# Altium PCB slave.PcbDoc (part 4 of 8)
Units mm, origin at the board's own origin, x right, y up, seen from the top; angles counter-clockwise.
Board outline 160 x 100 mm, 6 copper layers (Top, FUSED_VBAT-, Signals1, Signals2, SUPPLY, Bottom), stack 1.67 mm thick; 582 components, 375 nets, 1615 pads, 3043 vias.
Unrouted connection lines stored in the file: 1.
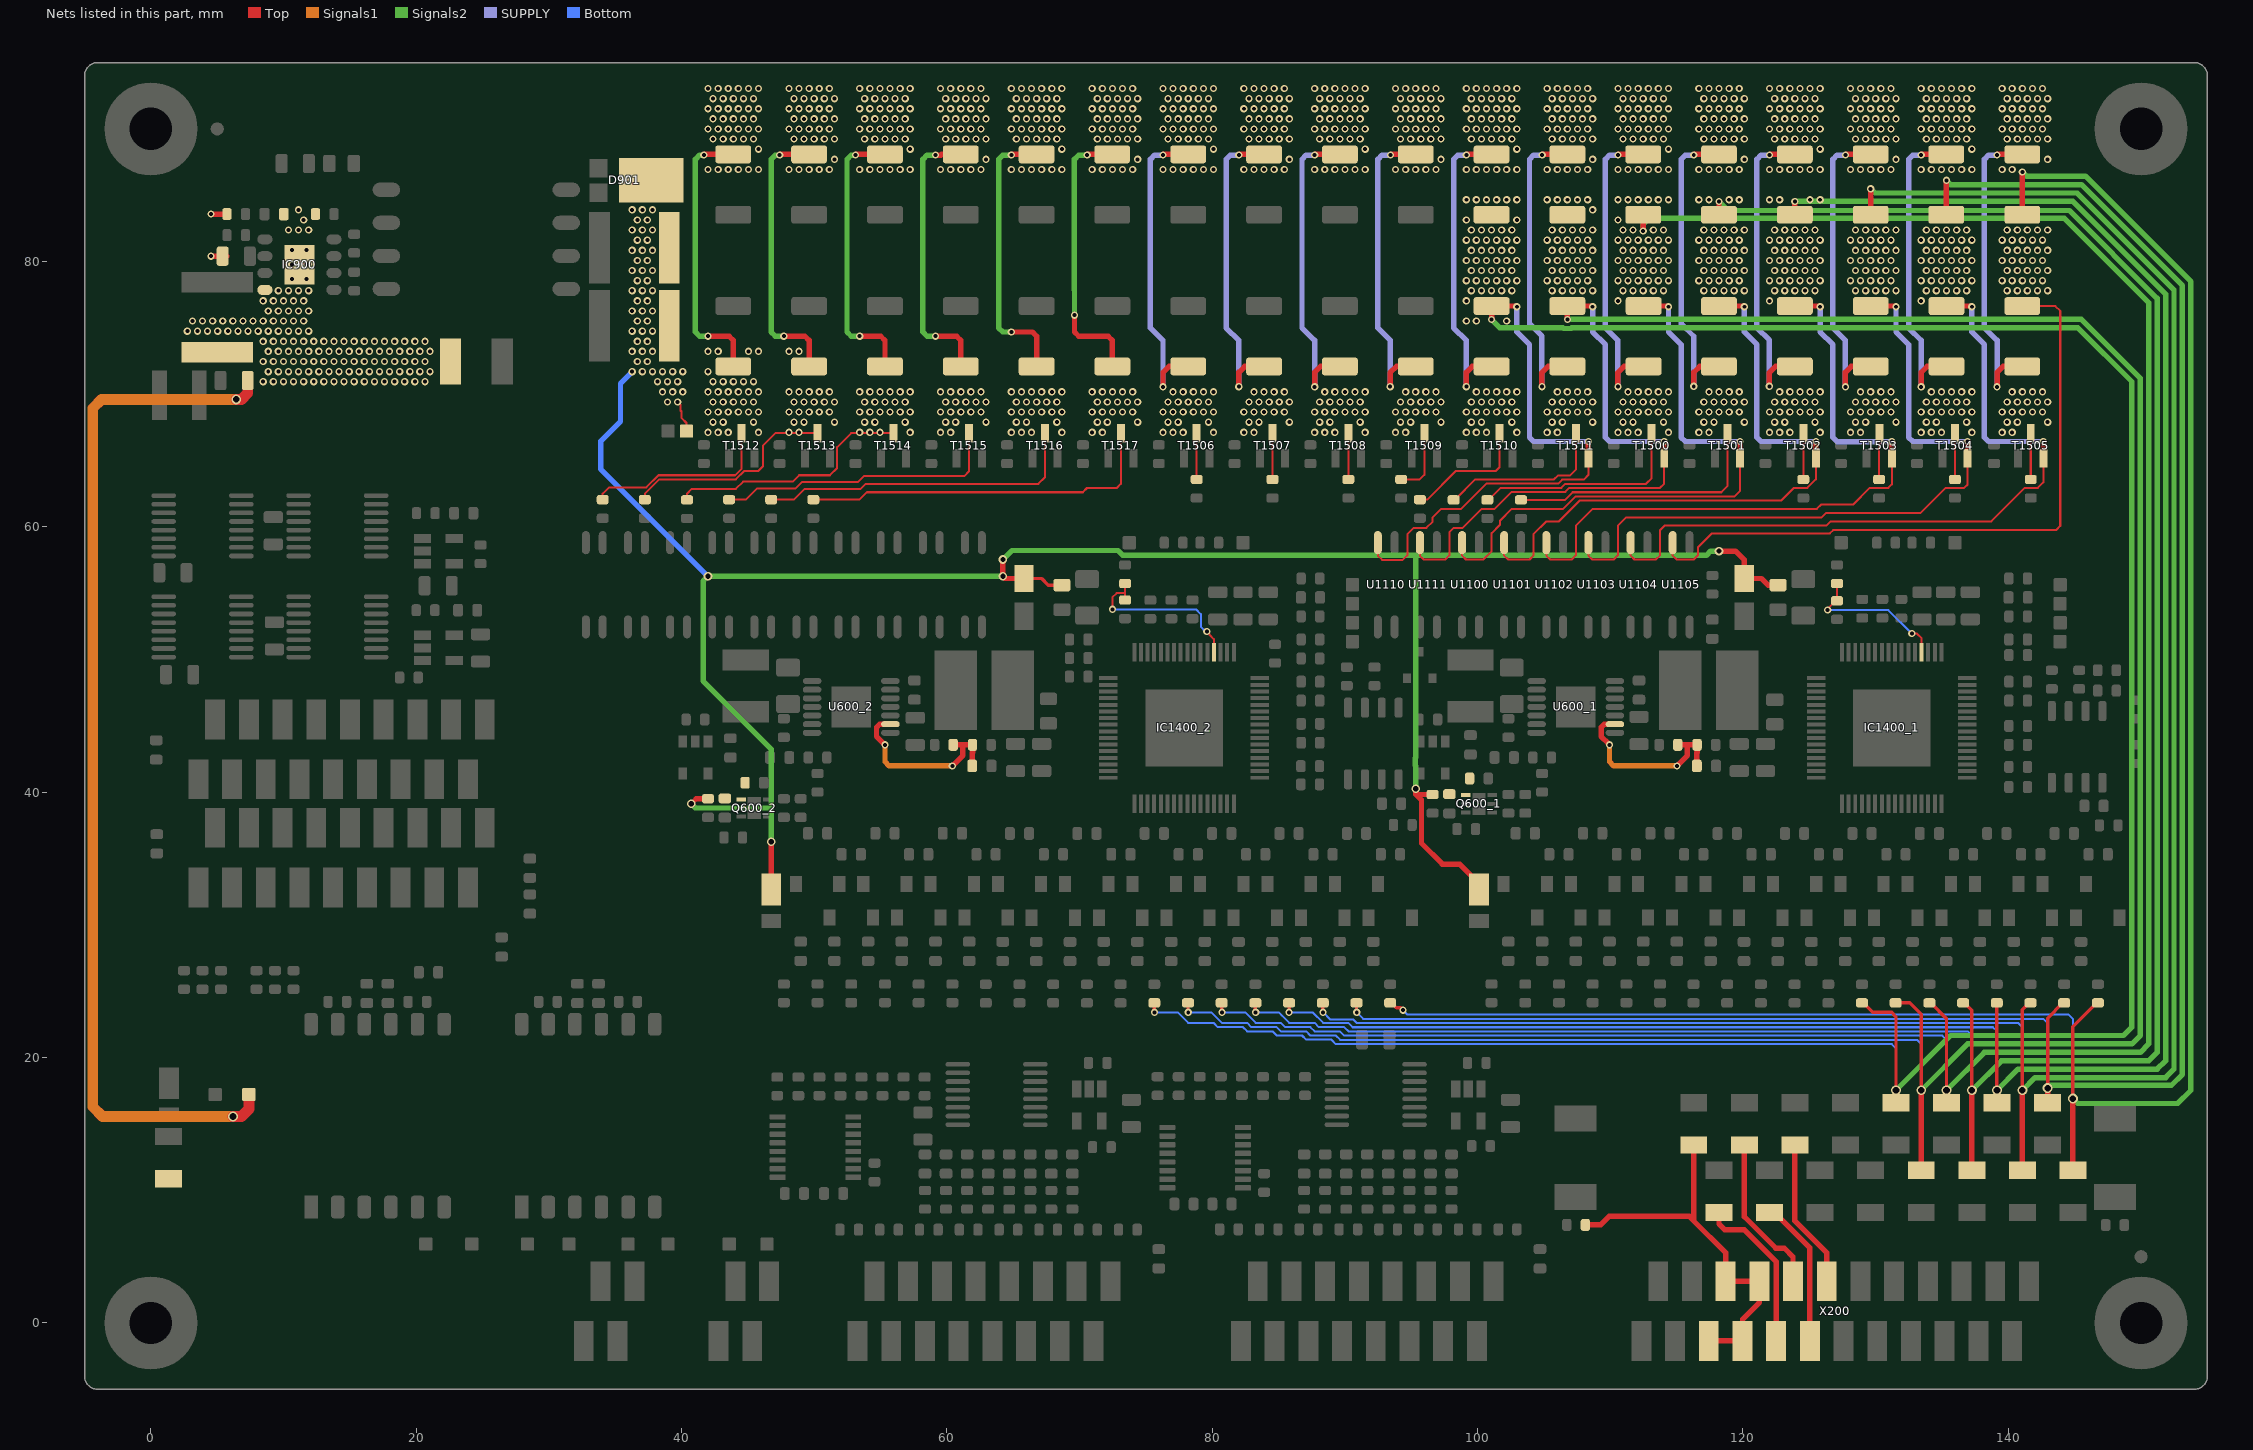
[diagram p7: the nets of this part, all layers, seen from the top]

## Via types
v1: diameter 0.55, hole 0.3, Top to Bottom, tented both sides, 2963 vias
v2: diameter 0.55, hole 0.3, Top to Bottom, 41 vias
v3: diameter 0.75, hole 0.5, Top to Bottom, tented both sides, 22 vias
v4: diameter 0.65, hole 0.4, Top to Bottom, tented both sides, 16 vias
v5: diameter 0.75, hole 0.5, Top to Bottom, 1 vias

## Nets (pads, with @x,y where several pads share a name; then routed paths per layer and width w, separated by ;. In a path a pad name is that pad's centre, name@x,y a point inside that pad or via, vN(x,y) a via of type N, cw(c..) or ccw(c..) an arc to the next point about the centre after c; other vN are vias at no path point) (continued)
CELL_10+: F308.1 X200.12 | length 11.5
  Top w0.406: F308.1@123.911,13.645 F308.1@123.911,13.405 123.911,7.692 126.313,5.29 X200.12@126.313,3.143
CELL_11+: F307.1 X200.11 | length 11.2
  Top w0.406: F307.1@122.006,8.325 122.371,8.325 125.043,5.653 X200.11@125.043,-1.357
CELL_12+: F306.1 X200.10 | length 12.4
  Top w0.406: F306.1@120.101,13.645 F306.1@120.101,13.405 120.101,8.002 122.474,5.628 123.117,5.628 123.773,4.973 X200.10@123.773,3.143
CELL_13+: F305.1 X200.9 | length 12.3
  Top w0.406: F305.1@118.196,8.325 118.196,7.451 118.631,7.016 120.111,7.016 122.503,4.625 X200.9@122.503,-1.357
CELL_14+: F304.1 SJ300.2 X200.5 X200.6 X200.7 X200.8 | length 30.2
  Top w0.406: SJ300.2@108.121,7.387 109.273,7.387 109.915,8.029 115.954,8.029 116.289,7.694 118.693,5.29 X200.6@118.693,3.143 X200.8@121.233,3.143 121.233,1.542 119.963,0.272 X200.7@119.963,-1.357 X200.5@117.423,-1.357 ; 116.291,7.696 F304.1@116.291,13.405 F304.1@116.291,13.645
CELL_FEEDBACK.CELL0_FEEDBACK+: R1105.1 R1505.2 R1511.2 T1505.3 | length 27.2
  Top w0.152: R1105.1@141.691,63.572 T1505.3@141.691,67.062
  Top w0.406: v1(139.151,70.557) 139.151,71.639 139.604,72.092 R1505.2@141.056,72.092 ; v1(139.151,88.02) 139.203,88.072 R1511.2@141.056,88.072
  SUPPLY w0.406: v1(139.151,70.557) 139.151,74.05 138.198,75.002 138.198,87.702 138.516,88.02 v1(139.151,88.02)
  other v1: 139.532,67.128 140.294,67.128 139.913,67.89 140.675,67.89 142.961,67.89 139.532,68.652 140.294,68.652 141.056,68.652 141.818,68.652 142.58,68.652 139.913,69.414 140.675,69.414 141.437,69.414 142.199,69.414 142.961,69.414 140.294,70.176 141.056,70.176 141.818,70.176 142.58,70.176 139.532,86.94 140.294,86.94 142.961,87.702 139.913,89.226 140.675,89.226 141.437,89.226 142.199,89.226 142.961,89.226 139.532,89.988 140.294,89.988 141.056,89.988 141.818,89.988 142.58,89.988 139.913,90.75 140.675,90.75 141.437,90.75 142.199,90.75 142.961,90.75 139.532,91.512 140.294,91.512 141.056,91.512 141.818,91.512 142.58,91.512 139.913,92.274 140.675,92.274 141.437,92.274 142.199,92.274 142.961,92.274 139.532,93.036 140.294,93.036 141.056,93.036 141.818,93.036 142.58,93.036
CELL_FEEDBACK.CELL1_FEEDBACK+: R1104.1 R1504.2 R1510.2 T1504.3 | length 27.2
  Top w0.152: R1104.1@135.976,63.572 T1504.3@135.976,67.062
  Top w0.406: v1(133.436,70.557) 133.436,71.639 133.889,72.092 R1504.2@135.341,72.092 ; v1(133.436,88.02) 133.488,88.072 R1510.2@135.321,88.072
  SUPPLY w0.406: v1(133.436,70.557) 133.436,74.05 132.483,75.002 132.483,87.702 132.801,88.02 v1(133.436,88.02)
  other v1: 133.436,67.128 134.198,67.128 134.96,67.128 137.246,67.128 133.817,67.89 134.579,67.89 136.865,67.89 133.436,68.652 134.198,68.652 134.96,68.652 135.722,68.652 136.484,68.652 137.246,68.652 133.817,69.414 134.579,69.414 135.341,69.414 136.103,69.414 136.865,69.414 134.198,70.176 134.96,70.176 135.722,70.176 136.484,70.176 137.246,70.176 133.436,86.94 134.198,86.94 134.96,86.94 135.722,86.94 136.484,86.94 137.246,86.94 137.246,88.464 133.817,89.226 134.579,89.226 135.341,89.226 136.103,89.226 136.865,89.226 133.436,89.988 134.198,89.988 134.96,89.988 135.722,89.988 136.484,89.988 137.246,89.988 133.817,90.75 134.579,90.75 135.341,90.75 136.103,90.75 136.865,90.75 133.436,91.512 134.198,91.512 134.96,91.512 135.722,91.512 136.484,91.512 137.246,91.512 133.817,92.274 134.579,92.274 135.341,92.274 136.103,92.274 136.865,92.274 133.436,93.036 134.198,93.036 134.96,93.036 135.722,93.036 136.484,93.036 137.246,93.036
CELL_FEEDBACK.CELL2_FEEDBACK+: R1103.1 R1503.2 R1509.2 T1503.3 | length 27.2
  Top w0.152: R1103.1@130.261,63.572 130.261,66.248 130.273,66.261 T1503.3@130.273,67.062
  Top w0.406: v1(127.721,70.557) 127.721,71.639 128.174,72.092 R1503.2@129.626,72.092 ; v1(127.721,88.02) 127.773,88.072 R1509.2@129.626,88.072
  SUPPLY w0.406: v1(127.721,70.557) 127.721,74.05 126.768,75.002 126.768,87.702 127.086,88.02 v1(127.721,88.02)
  other v1: 128.102,67.128 128.864,67.128 128.483,67.89 129.245,67.89 131.531,67.89 128.102,68.652 128.864,68.652 129.626,68.652 130.388,68.652 131.15,68.652 128.483,69.414 129.245,69.414 130.007,69.414 130.769,69.414 131.531,69.414 128.864,70.176 129.626,70.176 130.388,70.176 131.15,70.176 128.102,86.94 128.864,86.94 129.626,86.94 130.388,86.94 131.15,86.94 131.531,87.702 128.483,89.226 129.245,89.226 130.007,89.226 130.769,89.226 131.531,89.226 128.102,89.988 128.864,89.988 129.626,89.988 130.388,89.988 131.15,89.988 128.483,90.75 129.245,90.75 130.007,90.75 130.769,90.75 131.531,90.75 128.102,91.512 128.864,91.512 129.626,91.512 130.388,91.512 131.15,91.512 128.483,92.274 129.245,92.274 130.007,92.274 130.769,92.274 131.531,92.274 128.102,93.036 128.864,93.036 129.626,93.036 130.388,93.036 131.15,93.036
CELL_FEEDBACK.CELL3_FEEDBACK+: R1102.1 R1502.2 R1508.2 T1502.3 | length 27.2
  Top w0.152: R1102.1@124.546,63.572 T1502.3@124.546,67.062
  Top w0.406: v1(121.987,70.587) 121.987,71.62 122.459,72.092 R1502.2@123.911,72.092 ; v1(122.006,88.02) 122.058,88.072 R1508.2@123.911,88.072
  SUPPLY w0.406: v1@122.006,70.606 v1(121.987,70.587) 121.987,74.068 121.053,75.002 121.053,87.702 121.371,88.02 v1(122.006,88.02)
  other v1: 122.006,67.128 122.768,67.128 123.53,67.128 125.816,67.128 122.387,67.89 123.149,67.89 125.435,67.89 122.006,68.652 122.768,68.652 123.53,68.652 124.292,68.652 125.054,68.652 125.816,68.652 122.387,69.414 123.149,69.414 123.911,69.414 124.673,69.414 125.435,69.414 122.768,70.176 123.53,70.176 124.292,70.176 125.054,70.176 125.816,70.176 122.006,86.94 122.768,86.94 123.53,86.94 124.292,86.94 125.054,86.94 125.816,86.94 125.816,88.464 122.387,89.226 123.149,89.226 123.911,89.226 124.673,89.226 125.435,89.226 122.006,89.988 122.768,89.988 123.53,89.988 124.292,89.988 125.054,89.988 125.816,89.988 122.387,90.75 123.149,90.75 123.911,90.75 124.673,90.75 125.435,90.75 122.006,91.512 122.768,91.512 123.53,91.512 124.292,91.512 125.054,91.512 125.816,91.512 122.387,92.274 123.149,92.274 123.911,92.274 124.673,92.274 125.435,92.274 122.006,93.036 122.768,93.036 123.53,93.036 124.292,93.036 125.054,93.036 125.816,93.036
CELL_FEEDBACK.CELL4_FEEDBACK+: R1101.1 R1501.2 R1507.2 T1501.3 | length 43.6
  Top w0.152: R1101.1@103.273,62.037 106.592,62.037 107.162,62.607 118.366,62.607 118.831,63.072 T1501.3@118.831,67.062
  Top w0.406: v1(116.291,70.587) 116.291,71.639 116.744,72.092 R1501.2@118.196,72.092 ; v1(116.291,88.02) 116.343,88.072 R1507.2@118.196,88.072
  SUPPLY w0.406: v1(116.291,70.587) 116.291,74.367 115.338,75.32 115.338,87.702 115.656,88.02 v1(116.291,88.02)
  other v1: 116.672,67.128 117.434,67.128 117.053,67.89 117.815,67.89 120.101,67.89 116.672,68.652 117.434,68.652 118.196,68.652 118.958,68.652 119.72,68.652 117.053,69.414 117.815,69.414 118.577,69.414 119.339,69.414 120.101,69.414 117.434,70.176 118.196,70.176 118.958,70.176 119.72,70.176 116.672,86.94 117.434,86.94 118.196,86.94 118.958,86.94 119.72,86.94 120.101,87.702 117.053,89.226 117.815,89.226 118.577,89.226 119.339,89.226 120.101,89.226 116.672,89.988 117.434,89.988 118.196,89.988 118.958,89.988 119.72,89.988 117.053,90.75 117.815,90.75 118.577,90.75 119.339,90.75 120.101,90.75 116.672,91.512 117.434,91.512 118.196,91.512 118.958,91.512 119.72,91.512 117.053,92.274 117.815,92.274 118.577,92.274 119.339,92.274 120.101,92.274 116.672,93.036 117.434,93.036 118.196,93.036 118.958,93.036 119.72,93.036
CELL_FEEDBACK.CELL5_FEEDBACK+: R1100.1 R1500.2 R1506.2 T1500.3 | length 40.2
  Top w0.152: R1100.1@100.733,62.037 100.833,62.037 101.733,62.937 106.313,62.937 106.618,63.242 112.693,63.242 113.116,63.665 T1500.3@113.116,67.062
  Top w0.406: v1(110.576,70.567) 110.576,71.619 111.049,72.092 R1500.2@112.511,72.092 ; v1(110.576,88.02) 110.628,88.072 R1506.2@112.481,88.072
  SUPPLY w0.406: v1(110.576,70.567) 110.576,74.05 109.623,75.002 109.623,87.702 109.941,88.02 v1(110.576,88.02)
  other v1: 110.576,67.128 111.338,67.128 112.1,67.128 114.386,67.128 110.957,67.89 111.719,67.89 114.005,67.89 110.576,68.652 111.338,68.652 112.1,68.652 112.862,68.652 113.624,68.652 114.386,68.652 110.957,69.414 111.719,69.414 112.481,69.414 113.243,69.414 114.005,69.414 111.338,70.176 112.1,70.176 112.862,70.176 113.624,70.176 114.386,70.176 110.576,86.94 111.338,86.94 112.1,86.94 112.862,86.94 113.624,86.94 114.386,86.94 114.386,88.464 110.957,89.226 111.719,89.226 112.481,89.226 113.243,89.226 114.005,89.226 110.576,89.988 111.338,89.988 112.1,89.988 112.862,89.988 113.624,89.988 114.386,89.988 110.957,90.75 111.719,90.75 112.481,90.75 113.243,90.75 114.005,90.75 110.576,91.512 111.338,91.512 112.1,91.512 112.862,91.512 113.624,91.512 114.386,91.512 110.957,92.274 111.719,92.274 112.481,92.274 113.243,92.274 114.005,92.274 110.576,93.036 111.338,93.036 112.1,93.036 112.862,93.036 113.624,93.036 114.386,93.036
CELL_FEEDBACK.CELL6_FEEDBACK+: R1111.1 R1523.2 R1529.2 T1511.3 | length 36.6
  Top w0.152: R1111.1@98.193,62.037 98.293,62.037 99.829,63.573 105.759,63.573 106.063,63.877 106.971,63.877 107.401,64.307 T1511.3@107.401,67.062
  Top w0.406: v1(104.848,70.567) 104.848,71.626 105.314,72.092 R1523.2@106.766,72.092 ; v1(104.861,88.02) 104.913,88.072 R1529.2@106.766,88.072
  SUPPLY w0.406: v1@104.861,70.58 v1(104.848,70.567) 104.848,74.38 103.908,75.32 103.908,87.702 104.226,88.02 v1(104.861,88.02)
  other v1: 105.242,67.128 106.004,67.128 105.623,67.89 106.385,67.89 108.671,67.89 105.242,68.652 106.004,68.652 106.766,68.652 107.528,68.652 108.29,68.652 105.623,69.414 106.385,69.414 107.147,69.414 107.909,69.414 108.671,69.414 106.004,70.176 106.766,70.176 107.528,70.176 108.29,70.176 105.242,86.94 106.004,86.94 106.766,86.94 107.528,86.94 108.29,86.94 108.671,87.702 105.623,89.226 106.385,89.226 107.147,89.226 107.909,89.226 108.671,89.226 105.242,89.988 106.004,89.988 106.766,89.988 107.528,89.988 108.29,89.988 105.623,90.75 106.385,90.75 107.147,90.75 107.909,90.75 108.671,90.75 105.242,91.512 106.004,91.512 106.766,91.512 107.528,91.512 108.29,91.512 105.623,92.274 106.385,92.274 107.147,92.274 107.909,92.274 108.671,92.274 105.242,93.036 106.004,93.036 106.766,93.036 107.528,93.036 108.29,93.036
CELL_FEEDBACK.CELL7_FEEDBACK+: R1110.1 R1522.2 R1528.2 T1510.3 | length 33.3
  Top w0.152: R1110.1@95.648,62.05 96.2,62.05 98.362,64.212 101.368,64.212 101.666,64.51 T1510.3@101.666,67.062
  Top w0.406: v1(99.146,70.567) 99.146,71.639 99.599,72.092 R1522.2@101.051,72.092 ; v1(99.146,88.02) 99.198,88.072 R1528.2@101.051,88.072
  SUPPLY w0.406: v1(99.146,70.567) 99.146,74.05 98.193,75.002 98.193,87.702 98.511,88.02 v1(99.146,88.02)
  other v1: 99.146,67.128 99.908,67.128 100.67,67.128 102.956,67.128 99.527,67.89 100.289,67.89 102.575,67.89 99.146,68.652 99.908,68.652 100.67,68.652 101.432,68.652 102.194,68.652 102.956,68.652 99.527,69.414 100.289,69.414 101.051,69.414 101.813,69.414 102.575,69.414 99.908,70.176 100.67,70.176 101.432,70.176 102.194,70.176 102.956,70.176 99.146,86.94 99.908,86.94 100.67,86.94 101.432,86.94 102.194,86.94 102.956,86.94 102.956,88.464 99.527,89.226 100.289,89.226 101.051,89.226 101.813,89.226 102.575,89.226 99.146,89.988 99.908,89.988 100.67,89.988 101.432,89.988 102.194,89.988 102.956,89.988 99.527,90.75 100.289,90.75 101.051,90.75 101.813,90.75 102.575,90.75 99.146,91.512 99.908,91.512 100.67,91.512 101.432,91.512 102.194,91.512 102.956,91.512 99.527,92.274 100.289,92.274 101.051,92.274 101.813,92.274 102.575,92.274 99.146,93.036 99.908,93.036 100.67,93.036 101.432,93.036 102.194,93.036 102.956,93.036
CELL_FEEDBACK.CELL8_FEEDBACK+: R1109.1 R1521.2 R1527.2 T1509.3 | length 28.7
  Top w0.152: R1109.1@94.241,63.572 95.636,63.572 95.986,63.921 T1509.3@95.986,67.062
  Top w0.406: v1(93.411,70.567) 93.411,71.619 93.884,72.092 R1521.2@95.336,72.092 ; v1(93.431,88.02) 93.483,88.072 R1527.2@95.336,88.072
  SUPPLY w0.406: v1(93.411,70.567) 93.411,74.07 92.478,75.002 92.478,87.702 92.796,88.02 v1(93.431,88.02)
  other v1: 93.812,67.128 94.574,67.128 94.193,67.89 94.955,67.89 97.241,67.89 93.812,68.652 94.574,68.652 95.336,68.652 96.098,68.652 96.86,68.652 94.193,69.414 94.955,69.414 95.717,69.414 96.479,69.414 97.241,69.414 94.574,70.176 95.336,70.176 96.098,70.176 96.86,70.176 93.812,86.94 94.574,86.94 95.336,86.94 96.098,86.94 96.86,86.94 97.241,87.702 94.193,89.226 94.955,89.226 95.717,89.226 96.479,89.226 97.241,89.226 93.812,89.988 94.574,89.988 95.336,89.988 96.098,89.988 96.86,89.988 94.193,90.75 94.955,90.75 95.717,90.75 96.479,90.75 97.241,90.75 93.812,91.512 94.574,91.512 95.336,91.512 96.098,91.512 96.86,91.512 94.193,92.274 94.955,92.274 95.717,92.274 96.479,92.274 97.241,92.274 93.812,93.036 94.574,93.036 95.336,93.036 96.098,93.036 96.86,93.036
CELL_FEEDBACK.CELL9_FEEDBACK+: R1108.1 R1520.2 R1526.2 T1508.3 | length 27.2
  Top w0.152: R1108.1@90.256,63.572 T1508.3@90.256,67.062
  Top w0.406: v1(87.716,70.557) 87.716,71.639 88.169,72.092 R1520.2@89.621,72.092 ; v1(87.716,88.02) 87.768,88.072 R1526.2@89.621,88.072
  SUPPLY w0.406: v1(87.716,70.557) 87.716,74.05 86.763,75.002 86.763,87.702 87.081,88.02 v1(87.716,88.02)
  other v1: 87.716,67.128 88.478,67.128 89.24,67.128 91.526,67.128 88.097,67.89 88.859,67.89 91.145,67.89 87.716,68.652 88.478,68.652 89.24,68.652 90.002,68.652 90.764,68.652 91.526,68.652 88.097,69.414 88.859,69.414 89.621,69.414 90.383,69.414 91.145,69.414 88.478,70.176 89.24,70.176 90.002,70.176 90.764,70.176 91.526,70.176 87.716,86.94 88.478,86.94 89.24,86.94 90.002,86.94 90.764,86.94 91.526,86.94 91.526,88.464 88.097,89.226 88.859,89.226 89.621,89.226 90.383,89.226 91.145,89.226 87.716,89.988 88.478,89.988 89.24,89.988 90.002,89.988 90.764,89.988 91.526,89.988 88.097,90.75 88.859,90.75 89.621,90.75 90.383,90.75 91.145,90.75 87.716,91.512 88.478,91.512 89.24,91.512 90.002,91.512 90.764,91.512 91.526,91.512 88.097,92.274 88.859,92.274 89.621,92.274 90.383,92.274 91.145,92.274 87.716,93.036 88.478,93.036 89.24,93.036 90.002,93.036 90.764,93.036 91.526,93.036
CELL_FEEDBACK.CELL10_FEEDBACK+: R1107.1 R1519.2 R1525.2 T1507.3 | length 27.2
  Top w0.152: R1107.1@84.541,63.572 T1507.3@84.541,67.062
  Top w0.406: v1(82.001,70.567) 82.001,71.639 82.454,72.092 R1519.2@83.906,72.092 ; v1(82.001,88.02) 82.053,88.072 R1525.2@83.906,88.072
  SUPPLY w0.406: v1@82.001,70.557 v1(82.001,70.567) 82.001,74.05 81.048,75.002 81.048,87.702 81.366,88.02 v1(82.001,88.02)
  other v1: 82.382,67.128 83.144,67.128 82.763,67.89 83.525,67.89 85.811,67.89 82.382,68.652 83.144,68.652 83.906,68.652 84.668,68.652 85.43,68.652 82.763,69.414 83.525,69.414 84.287,69.414 85.049,69.414 85.811,69.414 83.144,70.176 83.906,70.176 84.668,70.176 85.43,70.176 82.382,86.94 83.144,86.94 83.906,86.94 84.668,86.94 85.43,86.94 85.811,87.702 82.763,89.226 83.525,89.226 84.287,89.226 85.049,89.226 85.811,89.226 82.382,89.988 83.144,89.988 83.906,89.988 84.668,89.988 85.43,89.988 82.763,90.75 83.525,90.75 84.287,90.75 85.049,90.75 85.811,90.75 82.382,91.512 83.144,91.512 83.906,91.512 84.668,91.512 85.43,91.512 82.763,92.274 83.525,92.274 84.287,92.274 85.049,92.274 85.811,92.274 82.382,93.036 83.144,93.036 83.906,93.036 84.668,93.036 85.43,93.036
CELL_FEEDBACK.CELL11_FEEDBACK+: R1106.1 R1518.2 R1524.2 T1506.3 | length 27.2
  Top w0.152: R1106.1@78.826,63.572 T1506.3@78.826,67.062
  Top w0.406: v1(76.286,70.557) 76.286,71.639 76.739,72.092 R1518.2@78.191,72.092 ; v1(76.286,88.02) 76.338,88.072 R1524.2@78.191,88.072
  SUPPLY w0.406: v1(76.286,70.557) 76.286,74.05 75.333,75.002 75.333,87.702 75.651,88.02 v1(76.286,88.02)
  other v1: 76.286,67.128 77.048,67.128 77.81,67.128 80.096,67.128 76.667,67.89 77.429,67.89 79.715,67.89 76.286,68.652 77.048,68.652 77.81,68.652 78.572,68.652 79.334,68.652 80.096,68.652 76.667,69.414 77.429,69.414 78.191,69.414 78.953,69.414 79.715,69.414 77.048,70.176 77.81,70.176 78.572,70.176 79.334,70.176 80.096,70.176 76.286,86.94 77.048,86.94 77.81,86.94 78.572,86.94 79.334,86.94 80.096,86.94 80.096,88.464 76.667,89.226 77.429,89.226 78.191,89.226 78.953,89.226 79.715,89.226 76.286,89.988 77.048,89.988 77.81,89.988 78.572,89.988 79.334,89.988 80.096,89.988 76.667,90.75 77.429,90.75 78.191,90.75 78.953,90.75 79.715,90.75 76.286,91.512 77.048,91.512 77.81,91.512 78.572,91.512 79.334,91.512 80.096,91.512 76.667,92.274 77.429,92.274 78.191,92.274 78.953,92.274 79.715,92.274 76.286,93.036 77.048,93.036 77.81,93.036 78.572,93.036 79.334,93.036 80.096,93.036
CELL_FEEDBACK.CELL12_FEEDBACK+: R1117.1 R1541.2 R1547.2 T1517.3 | length 48.6
  Top w0.152: R1117.1@49.921,62.05 53.407,62.05 53.965,62.607 70.241,62.607 70.561,62.927 72.801,62.927 73.111,63.237 T1517.3@73.111,67.062
  Top w0.406: v1(69.618,75.955) 69.618,74.685 69.936,74.367 72.158,74.367 72.471,74.054 R1541.2@72.471,72.092 ; v1(70.571,88.02) 70.623,88.072 R1547.2@72.456,88.072
  Signals2 w0.406: 69.608,77.86 69.608,87.692 69.936,88.02 v1(70.571,88.02) ; v1(69.618,75.955) 69.618,77.86
  other v1: 70.952,67.128 71.714,67.128 71.333,67.89 72.095,67.89 74.381,67.89 70.952,68.652 71.714,68.652 72.476,68.652 73.238,68.652 74,68.652 71.333,69.414 72.095,69.414 72.857,69.414 73.619,69.414 74.381,69.414 70.952,70.176 71.714,70.176 72.476,70.176 73.238,70.176 74,70.176 70.952,86.94 71.714,86.94 72.476,86.94 73.238,86.94 74,86.94 74.381,87.702 71.333,89.226 72.095,89.226 72.857,89.226 73.619,89.226 74.381,89.226 70.952,89.988 71.714,89.988 72.476,89.988 73.238,89.988 74,89.988 71.333,90.75 72.095,90.75 72.857,90.75 73.619,90.75 74.381,90.75 70.952,91.512 71.714,91.512 72.476,91.512 73.238,91.512 74,91.512 71.333,92.274 72.095,92.274 72.857,92.274 73.619,92.274 74.381,92.274 70.952,93.036 71.714,93.036 72.476,93.036 73.238,93.036 74,93.036
CELL_FEEDBACK.CELL13_FEEDBACK+: R1116.1 R1540.2 R1546.2 T1516.3 | length 45.8
  Top w0.152: R1116.1@46.758,62.05 48.461,62.05 49.272,62.861 53.501,62.861 53.876,63.237 66.899,63.237 67.396,63.733 T1516.3@67.396,67.062
  Top w0.406: v1(64.856,74.685) 66.443,74.685 66.761,74.367 R1540.2@66.761,72.092 ; v1(64.856,88.02) 64.908,88.072 R1546.2@66.761,88.072
  Signals2 w0.406: v1(64.856,74.685) 64.221,74.685 63.903,75.002 63.903,87.702 64.221,88.02 v1(64.856,88.02)
  other v1: 64.856,67.128 65.618,67.128 66.38,67.128 68.666,67.128 65.237,67.89 65.999,67.89 68.285,67.89 64.856,68.652 65.618,68.652 66.38,68.652 67.142,68.652 67.904,68.652 68.666,68.652 65.237,69.414 65.999,69.414 66.761,69.414 67.523,69.414 68.285,69.414 64.856,70.176 65.618,70.176 66.38,70.176 67.142,70.176 67.904,70.176 68.666,70.176 64.856,86.94 65.618,86.94 66.38,86.94 67.142,86.94 67.904,86.94 68.666,86.94 68.666,88.464 65.237,89.226 65.999,89.226 66.761,89.226 67.523,89.226 68.285,89.226 64.856,89.988 65.618,89.988 66.38,89.988 67.142,89.988 67.904,89.988 68.666,89.988 65.237,90.75 65.999,90.75 66.761,90.75 67.523,90.75 68.285,90.75 64.856,91.512 65.618,91.512 66.38,91.512 67.142,91.512 67.904,91.512 68.666,91.512 65.237,92.274 65.999,92.274 66.761,92.274 67.523,92.274 68.285,92.274 64.856,93.036 65.618,93.036 66.38,93.036 67.142,93.036 67.904,93.036 68.666,93.036
CELL_FEEDBACK.CELL14_FEEDBACK+: R1115.1 R1539.2 R1545.2 T1515.3 | length 43
  Top w0.152: R1115.1@43.583,62.05 44.853,62.05 45.707,62.904 48.596,62.904 49.062,63.369 53.29,63.369 53.747,63.826 61.3,63.826 61.681,64.207 T1515.3@61.681,67.062
  Top w0.406: v1(59.141,74.367) 60.728,74.367 61.046,74.05 R1539.2@61.046,72.092 ; v1(59.141,88.02) 59.542,88.02 59.594,88.072 R1545.2@61.046,88.072
  Signals2 w0.406: v1(59.141,74.367) 58.506,74.367 58.188,74.685 58.188,87.702 58.506,88.02 v1(59.141,88.02)
  other v1: 59.522,67.128 60.284,67.128 59.903,67.89 60.665,67.89 62.951,67.89 59.522,68.652 60.284,68.652 61.046,68.652 61.808,68.652 62.57,68.652 59.903,69.414 60.665,69.414 61.427,69.414 62.189,69.414 62.951,69.414 59.522,70.176 60.284,70.176 61.046,70.176 61.808,70.176 62.57,70.176 59.522,86.94 60.284,86.94 61.046,86.94 61.808,86.94 62.57,86.94 62.951,87.702 59.903,89.226 60.665,89.226 61.427,89.226 62.189,89.226 62.951,89.226 59.522,89.988 60.284,89.988 61.046,89.988 61.808,89.988 62.57,89.988 59.903,90.75 60.665,90.75 61.427,90.75 62.189,90.75 62.951,90.75 59.522,91.512 60.284,91.512 61.046,91.512 61.808,91.512 62.57,91.512 59.903,92.274 60.665,92.274 61.427,92.274 62.189,92.274 62.951,92.274 59.522,93.036 60.284,93.036 61.046,93.036 61.808,93.036 62.57,93.036
CELL_FEEDBACK.CELL15_FEEDBACK+: R1114.1 R1538.2 R1544.2 T1514.3 | length 39.9
  Top w0.152: R1114.1@40.408,62.037 40.408,62.489 40.781,62.861 44.092,62.861 44.642,63.412 48.386,63.412 48.864,63.89 51.18,63.89 51.728,64.438 51.728,66.015 52.776,67.062 T1514.3@55.966,67.062
  Top w0.406: v1(53.108,88.02) 53.161,88.072 R1544.2@55.331,88.072 ; v1(53.426,74.367) 55.013,74.367 55.331,74.05 R1538.2@55.331,72.092
  Signals2 w0.406: v1(53.108,88.02) 52.791,88.02 52.473,87.702 52.473,74.685 52.791,74.367 v1(53.426,74.367)
  other v1: 53.426,67.128 54.188,67.128 54.95,67.128 57.236,67.128 53.807,67.89 54.569,67.89 56.855,67.89 53.426,68.652 54.188,68.652 54.95,68.652 55.712,68.652 56.474,68.652 57.236,68.652 53.807,69.414 54.569,69.414 55.331,69.414 56.093,69.414 56.855,69.414 53.426,70.176 54.188,70.176 54.95,70.176 55.712,70.176 56.474,70.176 57.236,70.176 53.426,86.94 54.188,86.94 54.95,86.94 55.712,86.94 56.474,86.94 57.236,86.94 57.236,88.464 53.807,89.226 54.569,89.226 55.331,89.226 56.093,89.226 56.855,89.226 53.426,89.988 54.188,89.988 54.95,89.988 55.712,89.988 56.474,89.988 57.236,89.988 53.807,90.75 54.569,90.75 55.331,90.75 56.093,90.75 56.855,90.75 53.426,91.512 54.188,91.512 54.95,91.512 55.712,91.512 56.474,91.512 57.236,91.512 53.807,92.274 54.569,92.274 55.331,92.274 56.093,92.274 56.855,92.274 53.426,93.036 54.188,93.036 54.95,93.036 55.712,93.036 56.474,93.036 57.236,93.036
CELL_FEEDBACK.CELL16_FEEDBACK+: R1113.1 R1537.2 R1543.2 T1513.3 | length 37.3
  Top w0.152: R1113.1@37.233,62.05 37.233,62.501 38.304,63.572 44.084,63.572 44.719,64.207 45.782,64.207 46.123,64.548 46.123,66.112 47.073,67.062 T1513.3@50.251,67.062
  Top w0.406: v1(47.393,88.02) 47.446,88.072 R1543.2@49.616,88.072 ; v1(47.711,74.367) 49.298,74.367 49.616,74.05 49.616,72.869 R1537.2@49.616,72.092
  Signals2 w0.406: 46.758,76.261 46.758,74.685 47.076,74.367 v1(47.711,74.367) ; 46.758,76.307 46.758,87.702 47.076,88.02 v1(47.393,88.02)
  other v1: 48.092,67.128 48.854,67.128 48.473,67.89 49.235,67.89 51.521,67.89 48.092,68.652 48.854,68.652 49.616,68.652 50.378,68.652 51.14,68.652 48.473,69.414 49.235,69.414 49.997,69.414 50.759,69.414 51.521,69.414 48.092,70.176 48.854,70.176 49.616,70.176 50.378,70.176 51.14,70.176 48.092,73.224 48.854,73.224 48.092,86.94 48.854,86.94 49.616,86.94 50.378,86.94 51.14,86.94 51.521,87.702 48.473,89.226 49.235,89.226 49.997,89.226 50.759,89.226 51.521,89.226 48.092,89.988 48.854,89.988 49.616,89.988 50.378,89.988 51.14,89.988 48.473,90.75 49.235,90.75 49.997,90.75 50.759,90.75 51.521,90.75 48.092,91.512 48.854,91.512 49.616,91.512 50.378,91.512 51.14,91.512 48.473,92.274 49.235,92.274 49.997,92.274 50.759,92.274 51.521,92.274 48.092,93.036 48.854,93.036 49.616,93.036 50.378,93.036 51.14,93.036
CELL_FEEDBACK.CELL17_FEEDBACK+: R1112.1 R1536.2 R1542.2 T1512.3 | length 35.5
  Top w0.152: R1112.1@34.058,62.05 34.058,62.501 34.535,62.978 37.351,62.978 38.263,63.89 44.042,63.89 44.536,64.383 T1512.3@44.536,67.062
  Top w0.406: v1(41.678,88.02) 41.731,88.072 R1542.2@43.901,88.072 ; v1(41.996,74.367) 43.583,74.367 43.901,74.05 R1536.2@43.901,72.092
  Signals2 w0.406: v1(41.678,88.02) 41.361,88.02 41.043,87.702 41.043,74.685 41.361,74.367 v1(41.996,74.367)
  other v1: 41.996,67.128 42.758,67.128 43.52,67.128 45.806,67.128 42.377,67.89 43.139,67.89 45.425,67.89 41.996,68.652 42.758,68.652 43.52,68.652 44.282,68.652 45.044,68.652 45.806,68.652 42.377,69.414 43.139,69.414 43.901,69.414 44.663,69.414 45.425,69.414 41.996,70.176 42.758,70.176 43.52,70.176 44.282,70.176 45.044,70.176 45.806,70.176 42.377,70.938 43.139,70.938 43.901,70.938 44.663,70.938 45.425,70.938 41.996,71.7 41.996,73.224 42.758,73.224 45.044,73.224 45.806,73.224 41.996,86.94 42.758,86.94 43.52,86.94 44.282,86.94 45.044,86.94 45.806,86.94 45.806,88.464 42.377,89.226 43.139,89.226 43.901,89.226 44.663,89.226 45.425,89.226 41.996,89.988 42.758,89.988 43.52,89.988 44.282,89.988 45.044,89.988 45.806,89.988 42.377,90.75 43.139,90.75 43.901,90.75 44.663,90.75 45.425,90.75 41.996,91.512 42.758,91.512 43.52,91.512 44.282,91.512 45.044,91.512 45.806,91.512 42.377,92.274 43.139,92.274 43.901,92.274 44.663,92.274 45.425,92.274 41.996,93.036 42.758,93.036 43.52,93.036 44.282,93.036 45.044,93.036 45.806,93.036
DTEN_1: IC1400_1.52 R1406_1.2 R1407_1.1 | length 11.1
  Top w0.152: v1(126.386,53.73) 126.386,53.83 126.986,54.43 R1406_1.2@127.086,54.43 ; R1406_1.2@127.086,54.48 R1407_1.1@127.086,55.52 ; v1(132.725,51.964) 133.106,51.964 133.463,51.607 IC1400_1.52@133.463,50.59
  Bottom w0.152: v1(126.386,53.73) 130.959,53.73 v1(132.725,51.964)
DTEN_2: IC1400_2.52 R1406_2.2 R1407_2.1 | length 13.5
  Top w0.152: v1(72.476,53.78) 72.476,54.682 72.793,55 73.428,55 ; R1407_2.1@73.313,55.52 R1407_2.1@73.428,55.52 ; R1406_2.2@73.428,54.48 73.428,55 ; R1407_2.1@73.428,55.728 R1407_2.1@73.428,55.52 ; v1(79.589,52.111) 79.805,51.894 79.805,51.846 80.123,51.528 IC1400_2.52@80.123,50.59 ; 73.428,55 R1407_2.1@73.428,55.52
  Bottom w0.152: v1(72.476,53.78) 78.776,53.78 79.143,53.412 79.143,52.46 79.492,52.111 v1(79.589,52.111)
EXT_DC_IN+: F900.1
EXT_DC_IN-: C900.1 C902.1 C903.1 C904.1 C906.1 IC900.4 IC900.9 R901.1 R905.1 TP900.1 | length 81.6
  Top w0.406: v1(4.531,80.4) C904.1@5.411,80.4 C904.1@5.711,80.4 ; v1(4.531,83.575) R901.1@5.736,83.575
  Top w0.813: v5(6.191,15.557) 6.826,15.557 7.388,16.12 TP900.1@7.388,17.217 ; v3(6.436,69.605) 6.826,69.605 7.302,70.081 C900.1@7.302,71.033
  Signals1 w0.813: v5(6.191,15.557) -3.652,15.557 -4.385,16.29 -4.385,68.944 -3.724,69.605 v3(6.436,69.605)
  other v1: 8.468,70.938 9.23,70.938 9.992,70.938 10.754,70.938 11.516,70.938 12.278,70.938 13.04,70.938 13.802,70.938 14.564,70.938 15.326,70.938 16.088,70.938 16.85,70.938 17.612,70.938 18.374,70.938 19.136,70.938 19.898,70.938 20.66,70.938 8.849,71.7 9.611,71.7 10.373,71.7 11.135,71.7 11.897,71.7 12.659,71.7 13.421,71.7 14.183,71.7 14.945,71.7 15.707,71.7 16.469,71.7 17.231,71.7 17.993,71.7 18.755,71.7 19.517,71.7 20.279,71.7 21.041,71.7 8.468,72.462 9.23,72.462 9.992,72.462 10.754,72.462 11.516,72.462 12.278,72.462 13.04,72.462 13.802,72.462 14.564,72.462 15.326,72.462 16.088,72.462 16.85,72.462 17.612,72.462 18.374,72.462 19.136,72.462 19.898,72.462 20.66,72.462 8.849,73.224 9.611,73.224 10.373,73.224 11.135,73.224 11.897,73.224 12.659,73.224 13.421,73.224 14.183,73.224 14.945,73.224 15.707,73.224 16.469,73.224 17.231,73.224 17.993,73.224 18.755,73.224 19.517,73.224 20.279,73.224 21.041,73.224 8.468,73.986 9.23,73.986 9.992,73.986 10.754,73.986 11.516,73.986 12.278,73.986 13.04,73.986 13.802,73.986 14.564,73.986 15.326,73.986 16.088,73.986 16.85,73.986 17.612,73.986 18.374,73.986 19.136,73.986 19.898,73.986 20.66,73.986 2.753,74.748 3.515,74.748 4.277,74.748 5.039,74.748 5.801,74.748 6.563,74.748 7.325,74.748 8.087,74.748 8.849,74.748 9.611,74.748 10.373,74.748 11.135,74.748 11.897,74.748 3.134,75.51 3.896,75.51 4.658,75.51 5.42,75.51 6.182,75.51 6.944,75.51 7.706,75.51 8.468,75.51 9.23,75.51 9.992,75.51 10.754,75.51 11.516,75.51 8.849,76.272 9.611,76.272 10.373,76.272 11.135,76.272 11.897,76.272 8.468,77.034 9.23,77.034 9.992,77.034 10.754,77.034 11.516,77.034 9.611,77.796 10.373,77.796 11.135,77.796 11.897,77.796 10.648,78.665 11.748,78.665 10.648,79.765 11.748,79.765 10.648,80.865 11.748,80.865 10.373,82.368 11.135,82.368 11.897,82.368 11.516,83.13 11.135,83.892
EXT_DC_ISO+: C608_1.1 C608_2.1 C907.2 C908.2 D901.1 D1400_1.2 D1400_2.2 D1401_1.1 D1401_2.1 Q600_1.4 Q600_2.4 R607_1.2 R607_2.2 R609_1.2 R609_2.2 R1401_1.1 R1401_2.1 TP902.1 | length 173.8
  Top w0.152: v1(39.71,69.414) 39.932,69.192 39.932,68.731 ; v1(39.71,70.938) v1@39.773,70.875 ; 40.005,68.739 40.005,68.192 40.372,67.825 TP902.1@40.372,67.223
  Top w0.254: D1401_2.1@65.808,56.107 67.131,56.107 67.631,55.607 R1401_2.1@68.666,55.607
  Top w0.406: v4(40.726,39.125) 41.108,39.507 R607_2.2@41.993,39.507 ; D1400_2.2@46.758,32.672 v4(46.758,36.267) ; v4(64.221,57.54) v4(64.221,56.27) 64.383,56.107 D1401_2.1@65.808,56.107 ; v4(95.336,40.249) 95.336,39.854 95.366,39.825 ; R607_1.2@96.606,39.825 95.366,39.825 ; D1400_1.2@100.098,32.672 100.098,33.122 98.643,34.577 97.343,34.577 95.768,36.152 95.768,39.422 95.366,39.825 ; v4(118.196,58.175) 119.435,58.175 120.101,57.509 D1401_1.1@120.101,56.207 ; D1401_1.1@120.101,56.107 121.389,56.107 121.889,55.607 R1401_1.1@122.641,55.607
  Signals2 w0.406: v4(40.726,39.125) 41.043,38.807 46.758,38.807 ; v4(46.758,36.267) 46.758,38.807 ; v4(64.221,56.27) v4(41.996,56.27) 41.632,55.906 41.632,48.379 46.758,43.252 46.758,38.807 ; v4(64.221,57.54) 64.902,58.221 72.896,58.221 73.26,57.857 95.336,57.857 ; v4(95.336,40.249) 95.336,41.971 95.289,42.017 95.289,42.582 95.336,42.628 95.336,57.857 ; v4(118.196,58.175) 117.561,58.175 117.243,57.857 95.336,57.857
  Bottom w0.406: v1@36.195,71.596 35.401,70.802 35.401,67.945 33.9,66.443 33.9,64.366 v4(41.996,56.27)
  other v1: 38.948,69.414 38.567,70.176 39.329,70.176 40.091,70.176 38.186,70.938 38.948,70.938 36.281,71.7 37.043,71.7 37.805,71.7 38.567,71.7 39.329,71.7 40.091,71.7 36.662,72.462 37.424,72.462 36.281,73.224 37.043,73.224 37.805,73.224 36.662,73.986 37.424,73.986 36.281,74.748 37.043,74.748 37.805,74.748 36.662,75.51 37.424,75.51 36.281,76.272 37.043,76.272 37.805,76.272 36.662,77.034 37.424,77.034 36.281,77.796 37.043,77.796 37.805,77.796 36.662,78.558 37.424,78.558 36.281,79.32 37.043,79.32 37.805,79.32 36.662,80.082 37.424,80.082 36.281,80.844 37.043,80.844 37.805,80.844 36.662,81.606 37.424,81.606 36.281,82.368 37.043,82.368 37.805,82.368 36.662,83.13 37.424,83.13 36.281,83.892 37.043,83.892 37.805,83.892
FB_1: C604_1.1 R602_1.2 R603_1.1 U600_1.9 | length 14.1
  Top w0.406: v1@109.855,43.656 109.306,44.205 109.306,44.884 109.549,45.127 U600_1.9@110.351,45.127 ; v1(115.021,41.982) 115.815,42.776 115.815,43.57 ; R603_1.1@115.086,43.57 115.815,43.57 ; C604_1.1@116.518,41.982 116.518,42.993 116.543,43.018 R602_1.2@116.543,43.57 115.815,43.57
  Signals1 w0.406: v1(109.941,43.57) 109.941,42.3 110.258,41.982 v1(115.021,41.982)
FB_2: C604_2.1 R602_2.2 R603_2.1 U600_2.9 | length 14.2
  Top w0.406: v1@55.335,43.574 55.327,43.574 54.696,44.205 54.696,44.884 54.939,45.127 U600_2.9@55.741,45.127 ; v1(60.411,41.982) 61.205,42.776 61.205,43.57 ; R603_2.1@60.476,43.57 61.205,43.57 ; C604_2.1@61.908,41.982 61.908,42.993 61.933,43.018 R602_2.2@61.933,43.57 61.205,43.57
  Signals1 w0.406: v1(55.331,43.57) 55.331,42.3 55.648,41.982 v1(60.411,41.982)
FUSED_CELL.CELL_0+: F318.2 R1305_1.1 R1305_2.1 R1504.1 R1510.1 T1505.2 U1104.2 | length 215.4
  Top w0.152: U1104.2@111.528,58.81 111.528,57.833 111.822,57.54 113.433,57.54 113.751,57.857 113.751,59.762 114.085,60.096 126.287,60.096 126.601,60.41 138.726,60.41 141.253,62.937 142.232,62.937 142.641,63.346 T1505.2@142.641,65.162
  Top w0.254: R1305_2.1@90.871,24.125 90.871,23.428 v1(90.891,23.408) ; v3(142.961,17.693) 142.961,22.975 144.111,24.125 R1305_1.1@144.211,24.125
  Top w0.406: R1510.1@135.321,83.522 135.321,86.095 v1(135.341,86.115) ; R1504.1@135.341,76.642 137.193,76.642 v1(137.246,76.59) ; T1505.2@142.641,65.162 142.641,66.427 v1(142.643,66.43) ; F318.2@142.961,16.585 v3(142.961,17.693)
  Signals2 w0.406: v1(135.341,86.115) 135.658,85.797 145.501,85.797 153.121,78.177 153.121,76.59 153.121,65.611 153.121,19.122 153.121,18.739 152.281,17.899 143.166,17.899 v3(142.961,17.693)
  SUPPLY w0.406: v1(137.246,76.59) 137.246,74.685 138.198,73.732 138.198,66.747 138.516,66.43 v1(142.643,66.43)
  Bottom w0.152: v1(90.891,23.408) 91.38,22.92 142.643,22.92 142.961,22.602 v3(142.961,17.693)
  other v1: 133.436,77.034 133.817,77.796 134.579,77.796 135.341,77.796 136.103,77.796 136.865,77.796 133.436,78.558 134.198,78.558 134.96,78.558 135.722,78.558 136.484,78.558 137.246,78.558 133.817,79.32 134.579,79.32 135.341,79.32 136.103,79.32 136.865,79.32 133.436,80.082 134.198,80.082 134.96,80.082 135.722,80.082 136.484,80.082 137.246,80.082 133.817,80.844 134.579,80.844 135.341,80.844 136.103,80.844 136.865,80.844 133.436,81.606 134.198,81.606 134.96,81.606 135.722,81.606 136.484,81.606 137.246,81.606 133.817,82.368 134.579,82.368 135.341,82.368 136.103,82.368 136.865,82.368
FUSED_CELL.CELL_0-: F319.2 R1306_1.1 R1306_2.1 R1505.1 R1511.1 U1105.2 | length 212.3
  Top w0.152: U1105.2@114.703,58.81 114.703,57.833 114.997,57.54 116.291,57.54 116.608,57.857 116.608,58.45 117.666,59.508 126.556,59.508 126.803,59.755 143.596,59.755 143.913,60.072 143.913,76.272 143.543,76.642 R1505.1@141.056,76.642
  Top w0.254: R1306_2.1@93.411,24.125 93.511,24.125 93.881,23.754 94.196,23.754 v1(94.383,23.567) ; v3(144.866,16.9) 144.866,22.34 146.651,24.125 R1306_1.1@146.751,24.125
  Top w0.406: R1511.1@141.056,83.575 v1(141.056,86.75) ; F319.2@144.866,11.25 F319.2@144.866,11.505 v3(144.866,16.9)
  Signals2 w0.406: v1(141.056,86.75) 141.373,86.432 145.818,86.432 153.756,78.495 153.756,65.611 153.756,17.535 152.757,16.536 145.23,16.536 v3(144.866,16.9)
  Bottom w0.152: v1(94.383,23.567) 94.713,23.237 144.548,23.237 144.866,22.92 v3(144.866,16.9)
  other v1: 139.913,77.796 140.675,77.796 141.437,77.796 142.199,77.796 142.961,77.796 139.532,78.558 140.294,78.558 141.056,78.558 141.818,78.558 142.58,78.558 139.913,79.32 140.675,79.32 141.437,79.32 142.199,79.32 142.961,79.32 139.532,80.082 140.294,80.082 141.056,80.082 141.818,80.082 142.58,80.082 139.913,80.844 140.675,80.844 141.437,80.844 142.199,80.844 142.961,80.844 139.532,81.606 140.294,81.606 141.056,81.606 141.818,81.606 142.58,81.606 139.913,82.368 140.675,82.368 141.437,82.368 142.199,82.368 142.961,82.368
FUSED_CELL.CELL_1+: F317.2 R1304_1.1 R1304_2.1 R1503.1 R1509.1 T1504.2 U1103.2 | length 223.7
  Top w0.152: U1103.2@108.353,58.81 108.353,57.833 108.647,57.54 110.258,57.54 110.576,57.857 110.576,60.087 111.203,60.715 125.931,60.715 126.248,61.032 133.371,61.032 135.276,62.937 136.676,62.937 136.926,63.187 T1504.2@136.926,65.162
  Top w0.254: R1304_2.1@88.331,24.125 88.331,23.428 v1(88.351,23.408) ; v3(141.056,17.535) 141.056,23.61 141.571,24.125 R1304_1.1@141.671,24.125
  Top w0.406: R1503.1@129.626,76.642 131.478,76.642 v1(131.531,76.59) ; R1509.1@129.626,83.522 v1(129.626,85.48) ; T1504.2@136.926,65.162 136.926,66.427 v1(136.928,66.43) ; F317.2@141.056,11.505 v3(141.056,17.535)
  Signals2 w0.406: v1(129.626,85.48) 129.943,85.162 145.183,85.162 152.486,77.86 152.486,76.59 152.486,65.611 152.486,19.122 151.851,18.487 142.008,18.487 v3(141.056,17.535)
  SUPPLY w0.406: v1(131.531,76.59) 131.531,74.685 132.483,73.732 132.483,66.747 132.801,66.43 v1(136.928,66.43)
  Bottom w0.152: v1(88.351,23.408) 88.891,22.869 90.637,22.869 90.903,22.602 140.738,22.602 141.056,22.285 v3(141.056,17.535)
  other v1: 128.483,77.796 129.245,77.796 130.007,77.796 130.769,77.796 131.531,77.796 128.102,78.558 128.864,78.558 129.626,78.558 130.388,78.558 131.15,78.558 128.483,79.32 129.245,79.32 130.007,79.32 130.769,79.32 131.531,79.32 128.102,80.082 128.864,80.082 129.626,80.082 130.388,80.082 131.15,80.082 128.483,80.844 129.245,80.844 130.007,80.844 130.769,80.844 131.531,80.844 128.102,81.606 128.864,81.606 129.626,81.606 130.388,81.606 131.15,81.606 128.483,82.368 129.245,82.368 130.007,82.368 130.769,82.368 131.531,82.368
FUSED_CELL.CELL_2+: F316.2 R1303_1.1 R1303_2.1 R1502.1 R1508.1 T1503.2 U1102.2 | length 220.9
  Top w0.152: U1102.2@105.178,58.81 105.178,57.833 105.472,57.54 107.083,57.54 107.401,57.857 107.401,60.08 108.671,61.35 125.566,61.35 125.883,61.667 128.291,61.667 129.561,62.937 130.961,62.937 131.223,63.2 T1503.2@131.223,65.162
  Top w0.254: v1(85.791,23.408) R1303_2.1@85.791,24.125 ; R1303_1.1@139.131,24.125 139.131,17.555 v3(139.151,17.535)
  Top w0.406: R1502.1@123.911,76.642 125.763,76.642 v1(125.816,76.59) ; R1508.1@123.911,83.522 v1(123.911,84.527) ; T1503.2@131.223,65.162 v1(131.223,66.42) ; F316.2@139.151,16.33 F316.2@139.151,16.585 v3(139.151,17.535)
  Signals2 w0.406: v1(123.911,84.527) 144.866,84.527 151.851,77.542 151.851,76.59 151.851,65.611 151.851,19.757 151.216,19.122 140.738,19.122 v3(139.151,17.535)
  SUPPLY w0.406: v1(125.816,76.59) 125.816,74.685 126.768,73.732 126.768,66.747 127.096,66.42 v1(131.223,66.42)
  Bottom w0.152: v1@85.811,23.408 87.557,23.408 88.351,22.615 90.256,22.615 90.586,22.285 138.833,22.285 139.151,21.967 v3(139.151,17.535)
  other v1: 122.006,77.034 122.387,77.796 123.149,77.796 123.911,77.796 124.673,77.796 125.435,77.796 122.006,78.558 122.768,78.558 123.53,78.558 124.292,78.558 125.054,78.558 125.816,78.558 122.387,79.32 123.149,79.32 123.911,79.32 124.673,79.32 125.435,79.32 122.006,80.082 122.768,80.082 123.53,80.082 124.292,80.082 125.054,80.082 125.816,80.082 122.387,80.844 123.149,80.844 123.911,80.844 124.673,80.844 125.435,80.844 122.006,81.606 122.768,81.606 123.53,81.606 124.292,81.606 125.054,81.606 125.816,81.606 122.387,82.368 123.149,82.368 123.911,82.368 124.673,82.368 125.435,82.368 122.006,84.654 122.768,84.654 125.054,84.654 125.816,84.654
FUSED_CELL.CELL_3+: F315.2 R1302_1.1 R1302_2.1 R1501.1 R1507.1 T1502.2 U1101.2 | length 229.2
  Top w0.152: U1101.2@102.003,58.81 102.003,57.833 102.297,57.54 103.908,57.54 104.226,57.857 104.226,59.469 105.154,60.397 106.098,60.397 107.686,61.985 122.893,61.985 123.846,62.937 124.86,62.937 125.496,63.573 T1502.2@125.496,65.162
  Top w0.254: R1302_2.1@83.251,24.125 83.251,23.428 v1(83.271,23.408) ; R1302_1.1@136.591,24.125 136.691,24.125 137.246,23.57 v3(137.246,17.535)
  Top w0.406: R1501.1@118.196,76.642 120.048,76.642 v1(120.101,76.59) ; R1507.1@118.196,83.522 v1(118.196,84.527) ; T1502.2@125.496,65.162 125.496,66.427 v1(125.498,66.43) ; F315.2@137.246,11.505 v3(137.246,17.535)
  Signals2 w0.406: v1(118.196,84.527) 118.877,83.846 144.595,83.846 151.216,77.225 151.216,76.59 151.216,65.611 151.216,20.392 150.581,19.757 139.468,19.757 v3(137.246,17.535)
  SUPPLY w0.406: v1(120.101,76.59) 120.101,74.685 121.053,73.732 121.053,66.747 121.371,66.43 v1(125.498,66.43)
  Bottom w0.152: v1(83.271,23.408) 85.017,23.408 85.236,23.189 85.236,23.179 85.8,22.615 87.716,22.615 88.033,22.297 89.938,22.297 90.268,21.967 136.928,21.967 137.246,21.65 v3(137.246,17.535)
  other v1: 117.053,77.796 117.815,77.796 118.577,77.796 119.339,77.796 120.101,77.796 116.672,78.558 117.434,78.558 118.196,78.558 118.958,78.558 119.72,78.558 117.053,79.32 117.815,79.32 118.577,79.32 119.339,79.32 120.101,79.32 116.672,80.082 117.434,80.082 118.196,80.082 118.958,80.082 119.72,80.082 117.053,80.844 117.815,80.844 118.577,80.844 119.339,80.844 120.101,80.844 116.672,81.606 117.434,81.606 118.196,81.606 118.958,81.606 119.72,81.606 117.053,82.368 117.815,82.368 118.577,82.368 119.339,82.368 120.101,82.368 116.672,84.654 117.434,84.654 118.958,84.654 119.72,84.654
FUSED_CELL.CELL_4+: F314.2 R1301_1.1 R1301_2.1 R1500.1 R1506.1 T1501.2 U1100.2 | length 228.9
  Top w0.152: U1100.2@98.828,58.81 98.828,57.833 99.122,57.54 100.416,57.54 101.051,58.175 101.051,59.527 101.686,60.162 101.686,60.45 102.586,61.35 106.448,61.35 107.401,62.302 119.368,62.302 119.781,62.715 T1501.2@119.781,65.162
  Top w0.254: R1301_2.1@80.711,24.125 80.711,23.428 v1(80.731,23.408) ; R1301_1.1@134.051,24.125 134.151,24.125 135.341,22.935 v3(135.341,17.535)
  Top w0.406: v1(112.481,82.305) R1506.1@112.481,83.522 ; R1500.1@112.511,76.642 114.333,76.642 v1(114.386,76.59) ; T1501.2@119.781,65.162 119.781,66.427 v1(119.783,66.43) ; F314.2@135.341,16.585 v3(135.341,17.535)
  Signals2 w0.406: v1(112.481,82.305) 112.481,82.781 112.957,83.257 144.231,83.257 150.581,76.907 150.581,76.59 150.581,64.842 150.581,21.027 149.946,20.392 138.198,20.392 v3(135.341,17.535)
  SUPPLY w0.406: v1(114.386,76.59) 114.386,74.685 115.338,73.732 115.338,66.747 115.656,66.43 v1(119.783,66.43)
  Bottom w0.152: v1(80.731,23.408) 82.477,23.408 83.271,22.615 85.176,22.615 85.493,22.297 87.398,22.297 87.716,21.98 89.621,21.98 89.951,21.65 135.023,21.65 135.341,21.332 v3(135.341,17.535)
  other v1: 110.576,77.034 110.957,77.796 111.719,77.796 112.481,77.796 113.243,77.796 114.005,77.796 110.576,78.558 111.338,78.558 112.1,78.558 112.862,78.558 113.624,78.558 114.386,78.558 110.957,79.32 111.719,79.32 112.481,79.32 113.243,79.32 114.005,79.32 110.576,80.082 111.338,80.082 112.1,80.082 112.862,80.082 113.624,80.082 114.386,80.082 110.957,80.844 111.719,80.844 112.481,80.844 113.243,80.844 114.005,80.844 110.576,81.606 111.338,81.606 112.1,81.606 112.862,81.606 113.624,81.606 114.386,81.606 110.957,82.368 111.719,82.368 113.243,82.368 114.005,82.368 110.576,83.13 110.576,84.654 111.338,84.654 112.1,84.654 112.862,84.654 113.624,84.654 114.386,84.654
FUSED_CELL.CELL_5+: F313.2 R1300_1.1 R1300_2.1 R1523.1 R1529.1 T1500.2 U1111.2 | length 231.1
  Top w0.152: U1111.2@95.653,58.81 95.653,57.833 95.947,57.54 97.558,57.54 97.876,57.857 97.876,59.601 98.193,59.919 98.865,59.919 100.296,61.35 101.286,61.35 102.573,62.637 106.621,62.637 106.921,62.937 113.748,62.937 114.066,63.255 T1500.2@114.066,65.162
  Top w0.254: R1300_2.1@78.171,24.125 78.171,23.428 v1(78.191,23.408) ; R1300_1.1@131.511,24.125 132.561,24.125 133.436,23.25 v3(133.436,17.535)
  Top w0.406: v1(106.769,75.632) 106.766,75.635 R1523.1@106.766,76.642 108.618,76.642 v1(108.671,76.59) ; T1500.2@114.066,65.162 v1(114.066,66.43) ; F313.2@133.436,11.505 v3(133.436,17.535)
  Signals2 w0.406: v1(106.769,75.632) 145.506,75.632 149.946,71.192 149.946,64.842 149.946,21.662 149.311,21.027 136.928,21.027 v3(133.436,17.535)
  SUPPLY w0.406: v1(108.671,76.59) 108.671,74.685 109.623,73.732 109.623,66.747 109.941,66.43 v1(114.066,66.43)
  Bottom w0.152: v1(78.191,23.408) 79.937,23.408 80.731,22.615 82.636,22.615 82.953,22.297 84.858,22.297 85.176,21.98 87.081,21.98 87.398,21.662 89.303,21.662 89.633,21.332 133.118,21.332 133.436,21.015 v3(133.436,17.535)
  other v1: 105.623,77.796 106.385,77.796 107.147,77.796 107.909,77.796 108.671,77.796 105.242,78.558 106.004,78.558 106.766,78.558 107.528,78.558 108.29,78.558 105.623,79.32 106.385,79.32 107.147,79.32 107.909,79.32 108.671,79.32 105.242,80.082 106.004,80.082 106.766,80.082 107.528,80.082 108.29,80.082 105.623,80.844 106.385,80.844 107.147,80.844 107.909,80.844 108.671,80.844 105.242,81.606 106.004,81.606 106.766,81.606 107.528,81.606 108.29,81.606 105.623,82.368 106.385,82.368 107.147,82.368 107.909,82.368 108.671,82.368 108.671,83.892 105.242,84.654 106.004,84.654 106.766,84.654 107.528,84.654 108.29,84.654
FUSED_CELL.CELL_6+: F312.2 R1312_1.1 R1312_2.1 R1522.1 R1528.1 T1511.2 U1110.2 | length 230.1
  Top w0.152: U1110.2@92.478,58.81 92.478,57.833 92.804,57.507 94.351,57.507 94.701,57.857 94.701,59.445 95.175,59.919 96.14,59.919 96.606,60.385 96.606,60.715 97.228,61.337 98.742,61.337 100.659,63.255 106.063,63.255 106.368,63.56 108.004,63.56 108.351,63.907 T1511.2@108.351,65.162
  Top w0.254: R1312_2.1@75.631,24.125 75.631,23.428 v1(75.651,23.408) ; R1312_1.1@128.971,24.075 R1312_1.1@128.991,24.055 ; R1312_1.1@128.971,24.125 129.071,24.125 129.787,23.408 131.213,23.408 131.531,23.091 v3(131.531,17.535)
  Top w0.406: v1(101.051,75.632) R1522.1@101.051,76.642 102.903,76.642 v1(102.956,76.59) ; T1511.2@108.351,65.162 108.351,66.427 v1(108.353,66.43) ; F312.2@131.531,16.585 v3(131.531,17.535)
  Signals2 w0.406: v1(101.051,75.632) 101.681,75.002 106.435,75.002 106.487,74.951 107.051,74.951 107.102,75.002 145.245,75.002 149.311,70.936 149.311,65.795 149.311,65.16 149.311,22.297 148.676,21.662 135.658,21.662 v3(131.531,17.535)
  SUPPLY w0.406: v1(102.956,76.59) 102.956,74.685 103.908,73.732 103.908,66.747 104.226,66.43 v1(108.353,66.43)
  Bottom w0.152: v1(75.651,23.408) 77.397,23.408 78.191,22.615 80.096,22.615 80.413,22.297 82.318,22.297 82.636,21.98 84.541,21.98 84.858,21.662 86.763,21.662 87.081,21.345 88.986,21.345 89.316,21.015 131.213,21.015 131.531,20.697 v3(131.531,17.535)
  other v1: 99.146,75.51 99.908,75.51 102.194,75.51 99.146,77.034 99.527,77.796 100.289,77.796 101.051,77.796 101.813,77.796 102.575,77.796 99.146,78.558 99.908,78.558 100.67,78.558 101.432,78.558 102.194,78.558 102.956,78.558 99.527,79.32 100.289,79.32 101.051,79.32 101.813,79.32 102.575,79.32 99.146,80.082 99.908,80.082 100.67,80.082 101.432,80.082 102.194,80.082 102.956,80.082 99.527,80.844 100.289,80.844 101.051,80.844 101.813,80.844 102.575,80.844 99.146,81.606 99.908,81.606 100.67,81.606 101.432,81.606 102.194,81.606 102.956,81.606 99.527,82.368 100.289,82.368 101.051,82.368 101.813,82.368 102.575,82.368 99.146,83.13 102.956,83.13 99.146,84.654 99.908,84.654 100.67,84.654 101.432,84.654 102.194,84.654 102.956,84.654